# EAGLE board Projeto do Esquemático + PCB do Minilab v8 (EAGLE 9.7.0)
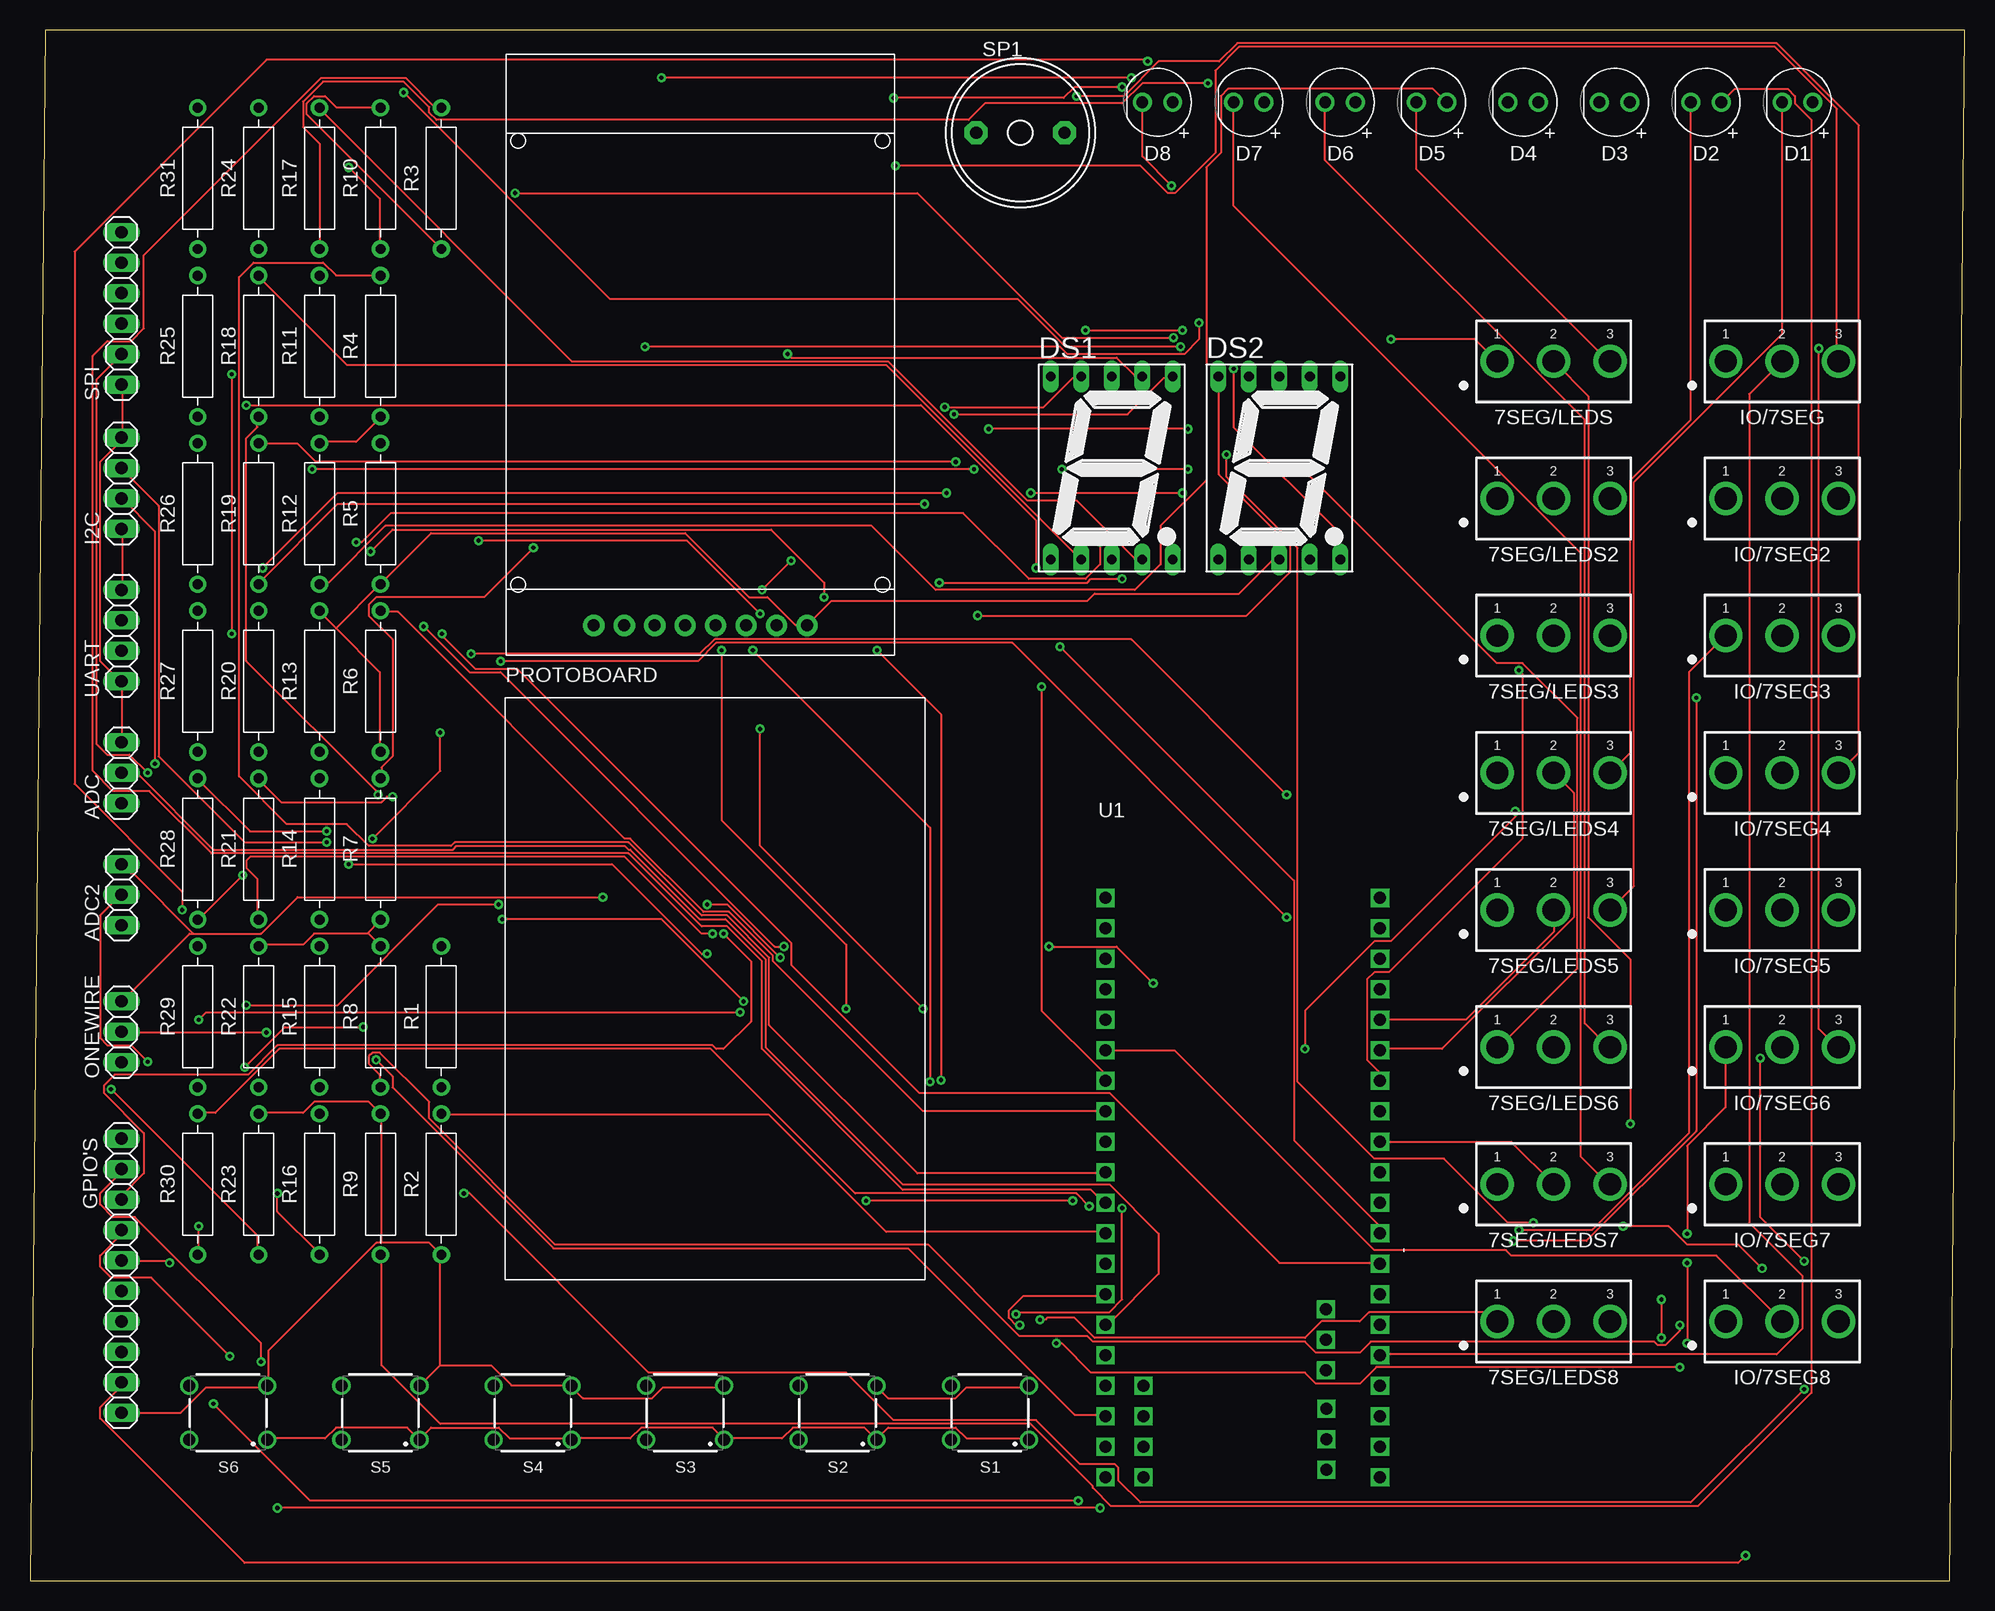
[diagram p0: board, top side]
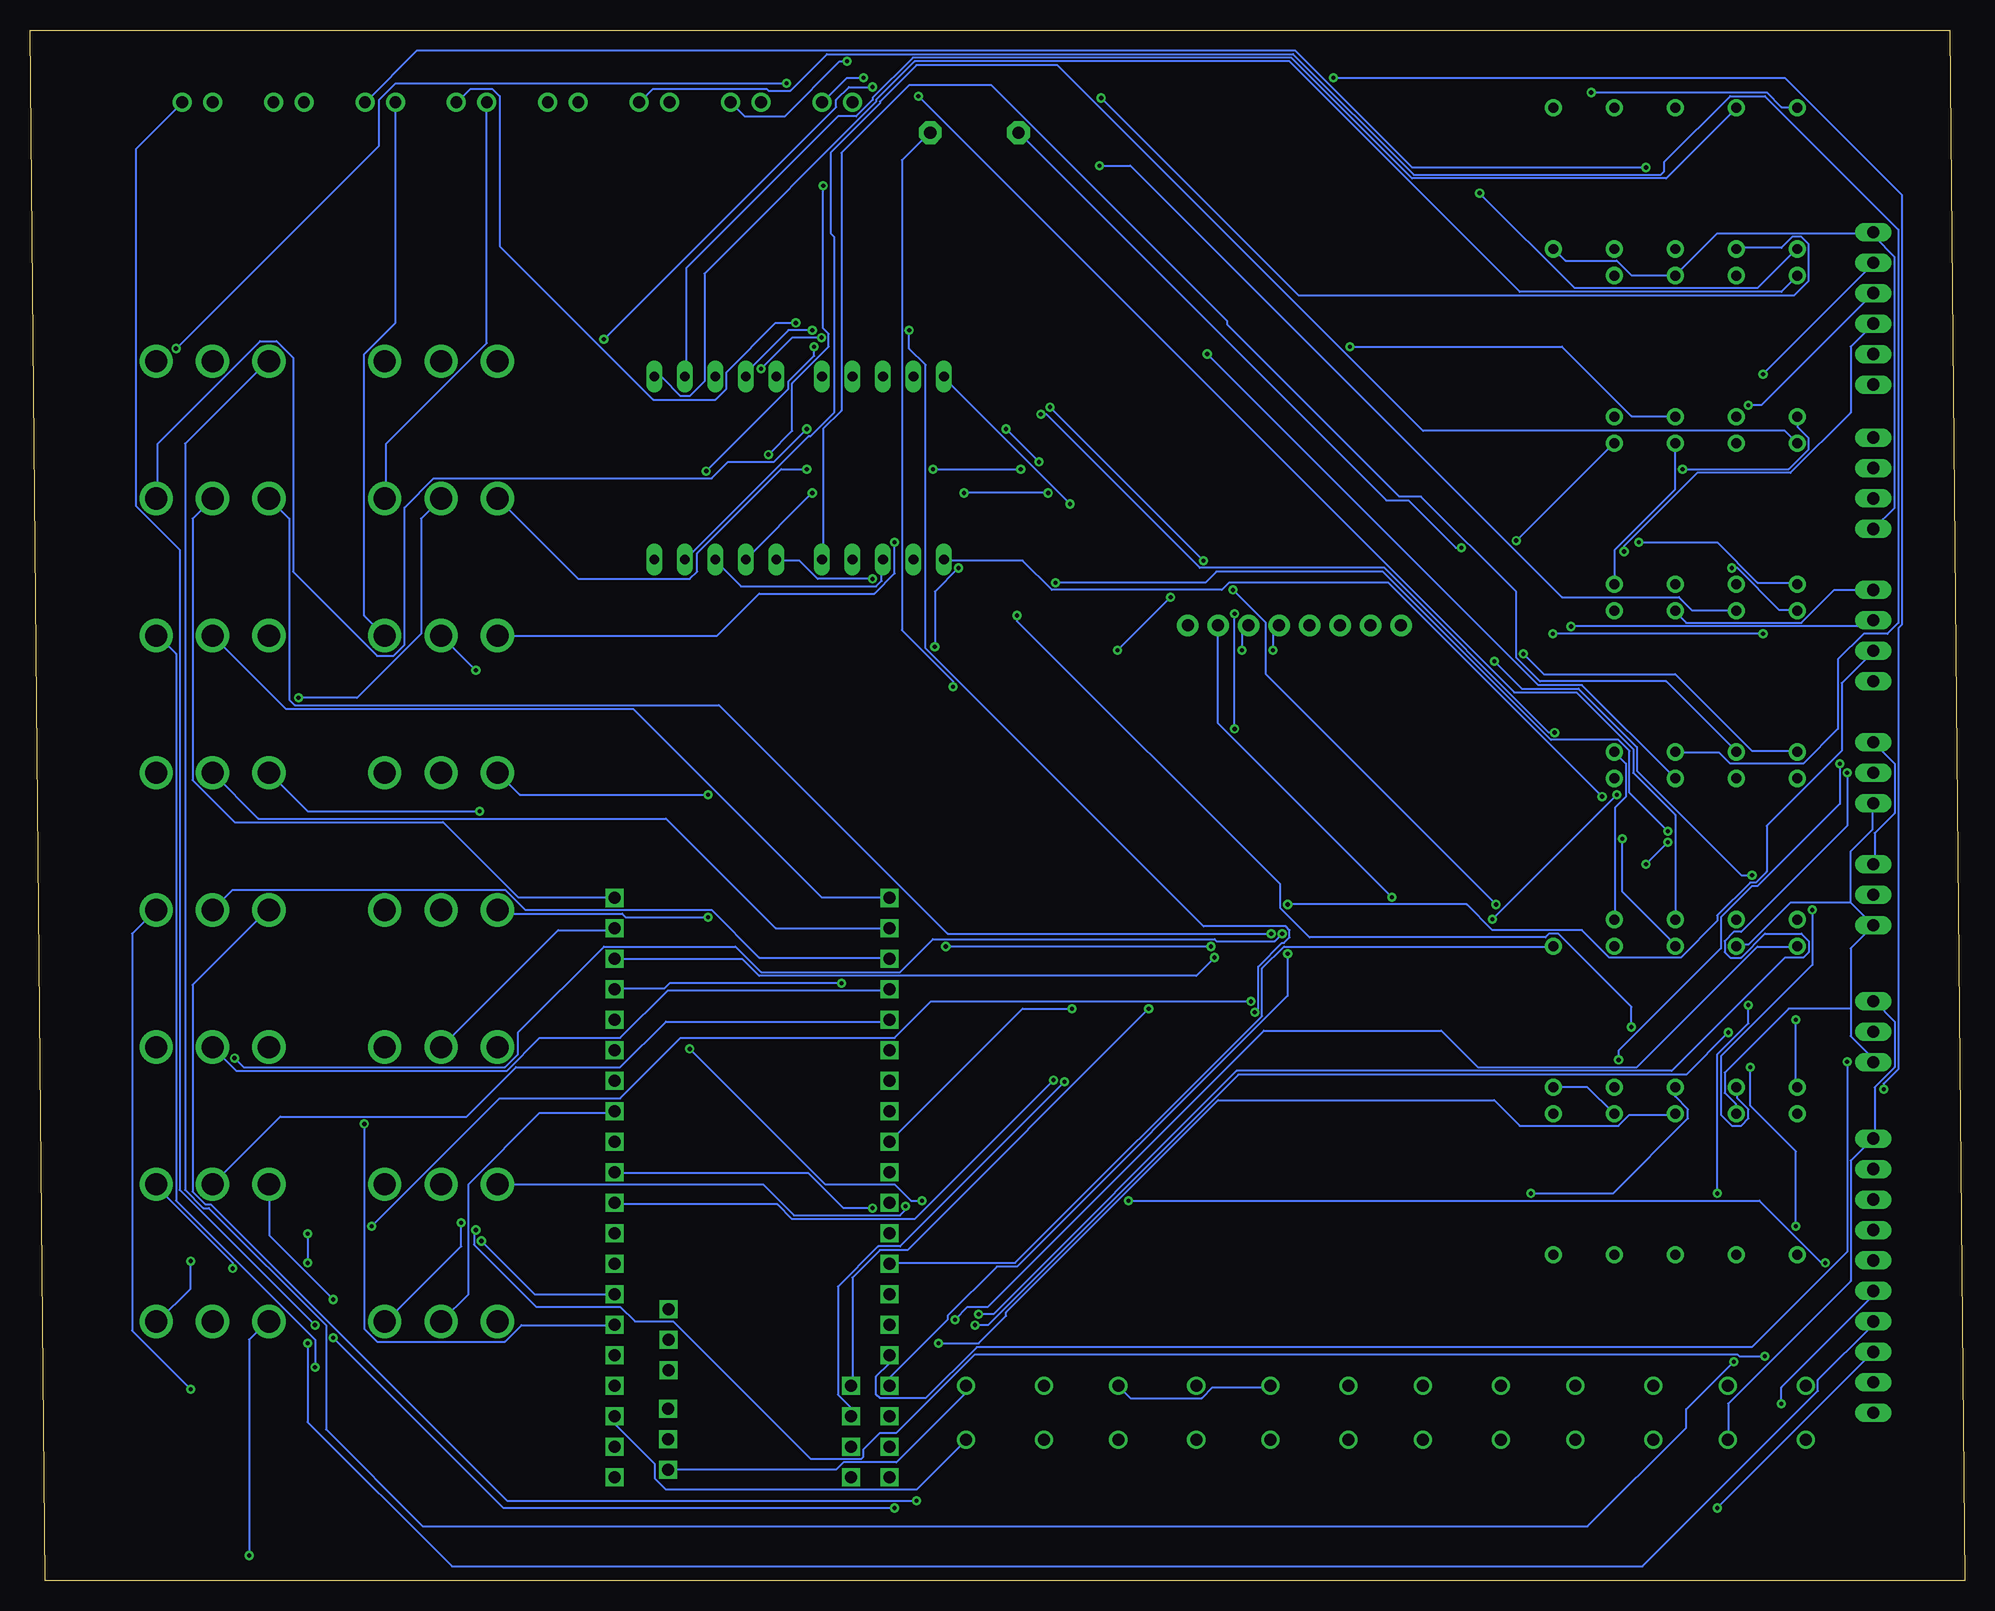
[diagram p1: board, bottom side, seen from below]

Size 161.27 x 129.21 mm. Coordinates in mm from the lower left corner, seen from the top.
Outline: 0,0 160,0 161.27,129.21 1.27,129.21 0,0
Copper layers (1*16): Top / Bottom
Stack-up Default Layer Stack: Top User Defined 0.035mm / Dielectric-1 User Defined 1.5mm / Bottom User Defined 0.035mm
Design rules "default": minimum track width 6mil, minimum drill 0.35mm, track to track 6mil, track to pad 6mil, pad to pad 6mil, via to via 6mil, smd to smd 6mil, copper to edge 40mil, drill to drill 6mil, minimum pad ring 10mil, minimum via ring 8mil, stop-mask expansion 4mil, vias tented up to drill 0mil, thermal gap 10mil

## Footprints (pad centres in the part's own frame; a part is rotated, then mirrored left to right if it is on the bottom)
472123010111 = drill 1.85: 1 4.7,0; 2 0,0; 3 -4.7,0
1X03 = drill 1.016 long: 1 -2.54,0; 2 0,0; 3 2.54,0
LEDRD254W60D565H860B = drill 0.981 pad 1.581: 1 -1.27,0; 2 1.27,0
7SEG-13 = drill 0.813 long: 1 -5.08,-7.62; 2 -2.54,-7.62; 3 0,-7.62; 4 2.54,-7.62; 5 5.08,-7.62; 6 5.08,7.62; 7 2.54,7.62; 8 0,7.62; 9 -2.54,7.62; 10 -5.08,7.62
1X10 = drill 1.016 long: 1 -11.43,0; 2 -8.89,0; 3 -6.35,0; 4 -3.81,0; 5 -1.27,0; 6 1.27,0; 7 3.81,0; 8 6.35,0; 9 8.89,0; 10 11.43,0
1X04 = drill 1.016 long: 1 -3.81,0; 2 -1.27,0; 3 1.27,0; 4 3.81,0
RESAD1176W63L850D250B = drill 0.83 pad 1.43: 1 -5.88,0; 2 5.88,0
4301X60507X6 = drill 1: 1 -3.25,2.25; 2 -3.25,-2.25; 3 3.25,2.25; 4 3.25,-2.25
AL11P = drill 1.016 pad 1.905 octagon: + 3.683,0; - -3.683,0
1X06 = drill 1.016 long: 1 -6.35,0; 2 -3.81,0; 3 -1.27,0; 4 1.27,0; 5 3.81,0; 6 6.35,0
FOOTPRINT-FRANZININHO = drill 1 square: P$1 -12.43,17.51; P$2 -12.43,14.97; P$3 -12.43,12.43; P$4 -12.43,9.89; P$5 -12.43,7.35; P$6 -12.43,4.81; P$7 -12.43,2.27; P$8 -12.43,-0.27; P$9 -12.43,-2.81; P$10 -12.43,-5.35; P$11 -12.43,-7.89; P$12 -12.43,-10.43; P$13 -12.43,-12.97; P$14 -12.43,-15.51; P$15 -12.43,-18.05; P$16 -12.43,-20.59; P$17 -12.43,-23.13; P$18 -12.43,-25.67; P$19 -12.43,-28.21; P$20 -12.43,-30.75; P$21 10.48,17.51; P$22 10.48,14.97; P$23 10.48,12.43; P$24 10.48,9.89; P$25 10.48,7.35; P$26 10.48,4.81; P$27 10.48,2.27; P$28 10.48,-0.27; P$29 10.48,-2.81; P$30 10.48,-5.35; P$31 10.48,-7.89; P$32 10.48,-10.43; P$33 10.48,-12.97; P$34 10.48,-15.51; P$35 10.48,-18.05; P$36 10.48,-20.59; P$37 10.48,-23.13; P$38 10.48,-25.67; P$39 10.48,-28.21; P$40 10.48,-30.75; P$41 -9.24,-23.13; P$42 -9.24,-25.67; P$43 -9.24,-28.21; P$44 -9.24,-30.75; P$45 6.01,-25.07; P$46 6.01,-27.61; P$47 6.01,-30.15; P$48 5.97,-16.78; P$49 5.97,-19.32; P$50 5.97,-21.86
1.44-TFT-V1.1 = drill 1 pad 1.778: BLK 0,17.78; CS 0,15.24; DC 0,12.7; GND 0,0; RESET 0,10.16; SCL 0,5.08; SDA 0,7.62; VCC 0,2.54

## Placement (x,y rotation side)
7SEG/LEDS  472123010111  [472123010111]  127,101.6 180 top
7SEG/LEDS2  472123010111  [472123010111]  127,90.17 180 top
7SEG/LEDS3  472123010111  [472123010111]  127,78.74 180 top
7SEG/LEDS4  472123010111  [472123010111]  127,67.31 180 top
7SEG/LEDS5  472123010111  [472123010111]  127,55.88 180 top
7SEG/LEDS6  472123010111  [472123010111]  127,44.45 180 top
7SEG/LEDS7  472123010111  [472123010111]  127,33.02 180 top
7SEG/LEDS8  472123010111  [472123010111]  127,21.59 180 top
ADC  PINHD-1X3  [1X03]  7.62,67.31 90 top
ADC2  PINHD-1X3  [1X03]  7.62,57.15 90 top
D1  LED_RED  [LEDRD254W60D565H860B]  147.32,123.19 180 top
D2  LED_RED  [LEDRD254W60D565H860B]  139.7,123.19 180 top
D3  LED_RED  [LEDRD254W60D565H860B]  132.08,123.19 180 top
D4  LED_RED  [LEDRD254W60D565H860B]  124.46,123.19 180 top
D5  LED_RED  [LEDRD254W60D565H860B]  116.84,123.19 180 top
D6  LED_RED  [LEDRD254W60D565H860B]  109.22,123.19 180 top
D7  LED_RED  [LEDRD254W60D565H860B]  101.6,123.19 180 top
D8  LED_RED  [LEDRD254W60D565H860B]  93.98,123.19 180 top
DS1  7SEG-CK  [7SEG-13]  90.17,92.71 0 top
DS2  7SEG-CK  [7SEG-13]  104.14,92.71 0 top
GPIO'S  PINHD-1X10  [1X10]  7.62,25.4 270 top
I2C  PINHD-1X4  [1X04]  7.62,91.44 90 top
IO/7SEG  472123010111  [472123010111]  146.05,101.6 180 top
IO/7SEG2  472123010111  [472123010111]  146.05,90.17 180 top
IO/7SEG3  472123010111  [472123010111]  146.05,78.74 180 top
IO/7SEG4  472123010111  [472123010111]  146.05,67.31 180 top
IO/7SEG5  472123010111  [472123010111]  146.05,55.88 180 top
IO/7SEG6  472123010111  [472123010111]  146.05,44.45 180 top
IO/7SEG7  472123010111  [472123010111]  146.05,33.02 180 top
IO/7SEG8  472123010111  [472123010111]  146.05,21.59 180 top
ONEWIRE  PINHD-1X3  [1X03]  7.62,45.72 90 top
PROTOBOARD  MINI-PROTOBOARD  [PROTOBOARDFOOTPRINT]  54.61,68.58 0 top
R1  [RESAD1176W63L850D250B]  34.29,46.99 90 top
R2  [RESAD1176W63L850D250B]  34.29,33.02 90 top
R3  [RESAD1176W63L850D250B]  34.29,116.84 90 top
R4  [RESAD1176W63L850D250B]  29.21,102.87 90 top
R5  [RESAD1176W63L850D250B]  29.21,88.9 90 top
R6  [RESAD1176W63L850D250B]  29.21,74.93 90 top
R7  [RESAD1176W63L850D250B]  29.21,60.96 90 top
R8  [RESAD1176W63L850D250B]  29.21,46.99 90 top
R9  [RESAD1176W63L850D250B]  29.21,33.02 90 top
R10  [RESAD1176W63L850D250B]  29.21,116.84 90 top
R11  [RESAD1176W63L850D250B]  24.13,102.87 90 top
R12  [RESAD1176W63L850D250B]  24.13,88.9 90 top
R13  [RESAD1176W63L850D250B]  24.13,74.93 90 top
R14  [RESAD1176W63L850D250B]  24.13,60.96 90 top
R15  [RESAD1176W63L850D250B]  24.13,46.99 90 top
R16  [RESAD1176W63L850D250B]  24.13,33.02 90 top
R17  [RESAD1176W63L850D250B]  24.13,116.84 90 top
R18  [RESAD1176W63L850D250B]  19.05,102.87 90 top
R19  [RESAD1176W63L850D250B]  19.05,88.9 90 top
R20  [RESAD1176W63L850D250B]  19.05,74.93 90 top
R21  [RESAD1176W63L850D250B]  19.05,60.96 90 top
R22  [RESAD1176W63L850D250B]  19.05,46.99 90 top
R23  [RESAD1176W63L850D250B]  19.05,33.02 90 top
R24  [RESAD1176W63L850D250B]  19.05,116.84 90 top
R25  [RESAD1176W63L850D250B]  13.97,102.87 90 top
R26  [RESAD1176W63L850D250B]  13.97,88.9 90 top
R27  [RESAD1176W63L850D250B]  13.97,74.93 90 top
R28  [RESAD1176W63L850D250B]  13.97,60.96 90 top
R29  [RESAD1176W63L850D250B]  13.97,46.99 90 top
R30  [RESAD1176W63L850D250B]  13.97,33.02 90 top
R31  [RESAD1176W63L850D250B]  13.97,116.84 90 top
S1  [4301X60507X6]  80.01,13.97 180 top
S2  [4301X60507X6]  67.31,13.97 180 top
S3  [4301X60507X6]  54.61,13.97 180 top
S4  [4301X60507X6]  41.91,13.97 180 top
S5  [4301X60507X6]  29.21,13.97 180 top
S6  [4301X60507X6]  16.51,13.97 180 top
SP1  AL11P  [AL11P]  82.55,120.65 0 top
SPI  PINHD-1X6  [1X06]  7.62,106.02 90 top
U1  FRANZININHOWIFI  [FOOTPRINT-FRANZININHO]  102.06,39.37 0 top
U$1  1.44"-TFT-V1.1  [1.44-TFT-V1.1]  64.77,79.6 90 top
UART  PINHD-1X4  [1X04]  7.62,78.74 90 top

## Library data of the parts
7SEG/LEDS 7SEG/LEDS2-7SEG/LEDS8 IO/7SEG IO/7SEG2-IO/7SEG8 = Wurth_Switch_WS-TOTV; ACTUATOR-LENGTH: 10.7mm; BUSHING-LENGTH: 9mm; DATASHEET-URL: https://www.we-online.com/redexpert/spec/472123010111?ae; MOUNT: THT; PART-NUMBER: 472123010111; SWITCHING-FUNCTION: ON-OFF-ON
ADC ADC2 GPIO'S I2C ONEWIRE SPI UART = Connector; CATEGORY: CONNECTOR; SUB-CATEGORY: PIN-HEADER
D1-D8 = Opto-Electronic; CATEGORY: Opto-Electronic; SUB-CATEGORY: LED
DS1 DS2 = Opto-Electronic; CATEGORY: Opto-Electronic; SUB-CATEGORY: Display; TYPE: 7-Segment
PROTOBOARD = MiniProtoboardLibrary
R1-R31 = Resistor; CATEGORY: Resistor; SUB-CATEGORY: Fixed
S1-S6 = Wurth_Switch_WS-TATV; DATASHEET-URL: https://www.we-online.com/catalog/datasheet/430156050726.pdf; H: 5.0mm; OPERATION-FORCE: 260g; PART-NUMBER: 430156050726; QTY: 200
SP1 = buzzer; OC_FARNELL: unknown; OC_NEWARK: unknown
U1 = Biblioteca Franzininho
U$1 = Biblioteca LCD

## Nets
3V3: U1.P$19
3V3_MALE: U1.P$43
5V_MALE: U1.P$48
5V_MALE1: U1.P$45
GND: U1.P$20
GND1: U1.P$39
GND2: U1.P$40
GND_MALE: U1.P$44
GND_MALE1: U1.P$49
GND_MALE2: U1.P$50
GND_MALE3: U1.P$46
N$1: R7.2 SP1.-
N$2: ADC2.1 ADC.1 DS1.3 DS2.3 GPIO'S.10 I2C.1 ONEWIRE.1 R1.1 R2.1 R3.1 R4.1 R5.1 R6.1 R7.1 R8.2 R9.2 R10.2 R11.2 R12.2 R13.2 R22.2 R23.2 S1.2 S2.2 S3.2 S4.2 S5.2 S6.2 SPI.6 U1.P$47 U$1.GND UART.4
N$3: R6.2 U1.P$8
N$4: 7SEG/LEDS4.2 U1.P$26
N$5: 7SEG/LEDS3.2 U1.P$27
N$6: R5.2 U1.P$9
N$7: 7SEG/LEDS.2 U1.P$35
N$8: 7SEG/LEDS2.2 U1.P$34
N$9: 7SEG/LEDS6.2 U1.P$22
N$10: R4.2 U1.P$10
N$11: R3.2 U1.P$11
N$12: R2.2 U1.P$12
N$13: R1.2 U1.P$13
N$14: U1.P$41 U$1.SDA
N$15: I2C.3 U1.P$17
N$16: ADC2.2 U1.P$16
N$17: 7SEG/LEDS5.2 U1.P$25
N$18: D1.1 R8.1
N$19: D2.1 R9.1
N$20: D3.1 R10.1
N$21: D4.1 R11.1
N$22: D5.1 R12.1
N$23: D6.1 R13.1
N$24: I2C.2 U1.P$18
N$25: U1.P$24 UART.3
N$26: U1.P$23 UART.2
N$27: SPI.2 U1.P$30
N$28: SPI.3 U1.P$31
N$29: SPI.4 U1.P$32
N$30: SPI.5 U1.P$33
N$31: D8.1 R23.1
N$32: ADC.2 U1.P$15
N$33: ONEWIRE.2 U1.P$14
N$34: SP1.+ U1.P$7
N$35: DS1.7 R14.2
N$36: IO/7SEG8.2 U1.P$6
N$37: IO/7SEG7.2 U1.P$5
N$38: DS1.6 R15.2
N$39: IO/7SEG3.2 U1.P$1
N$40: IO/7SEG6.2 U1.P$4
N$41: IO/7SEG5.2 U1.P$3
N$42: DS1.4 R17.2
N$43: DS1.2 R18.2
N$44: DS1.1 R21.2
N$45: IO/7SEG4.2 U1.P$2
N$46: DS1.9 R16.1
N$47: DS1.10 R19.1
N$48: IO/7SEG2.2 U1.P$21
N$49: DS1.5 R20.1
N$50: IO/7SEG.2 U1.P$36
N$51: ADC2.3 ADC.3 GPIO'S.1 I2C.4 ONEWIRE.3 S1.1 S2.1 S3.1 S4.1 S5.1 S6.1 SPI.1 U1.P$38 U$1.VCC UART.1
N$52: D7.1 R22.1
N$53: 7SEG/LEDS7.2 U1.P$29
N$54: 7SEG/LEDS8.2 U1.P$28
N$55: 7SEG/LEDS8.3 D8.2
N$56: DS2.2 R27.2
N$57: DS2.4 R26.2
N$58: DS2.6 R25.2
N$59: DS2.7 R24.2
N$60: DS2.1 R28.2
N$61: DS2.9 R29.1
N$62: DS2.10 R30.1
N$63: DS2.5 R31.1
N$64: 7SEG/LEDS.1 R24.1
N$65: 7SEG/LEDS2.1 R25.1
N$66: 7SEG/LEDS3.1 R26.1
N$67: 7SEG/LEDS4.1 R27.1
N$68: 7SEG/LEDS5.1 R28.1
N$69: 7SEG/LEDS6.1 R31.2
N$70: 7SEG/LEDS7.1 R30.2
N$71: 7SEG/LEDS8.1 R29.2
N$72: 7SEG/LEDS7.3 D7.2
N$73: 7SEG/LEDS6.3 D6.2
N$75: 7SEG/LEDS5.3 D1.2
N$76: 7SEG/LEDS4.3 D2.2
N$77: 7SEG/LEDS3.3 D3.2
N$78: 7SEG/LEDS2.3 D4.2
N$79: 7SEG/LEDS.3 D5.2
N$80: IO/7SEG7.3 R18.1
N$81: IO/7SEG6.3 R17.1
N$82: IO/7SEG5.3 R15.1
N$83: IO/7SEG4.3 R14.1
N$84: IO/7SEG8.3 R21.1
N$85: GPIO'S.9 IO/7SEG8.1
N$86: GPIO'S.8 IO/7SEG7.1
N$87: GPIO'S.7 IO/7SEG6.1
N$88: GPIO'S.6 IO/7SEG5.1
N$89: GPIO'S.5 IO/7SEG4.1
N$90: IO/7SEG3.3 R16.2
N$91: IO/7SEG2.3 R19.2
N$92: IO/7SEG.3 R20.2
N$93: GPIO'S.4 IO/7SEG3.1
N$94: GPIO'S.3 IO/7SEG2.1
N$95: GPIO'S.2 IO/7SEG.1
N$96: U1.P$42 U$1.SCL

## Tracks (layer width: path | path; a pad name or v marks a point on that pad's centre or on a via)
N$1  (via drill 0.35)
  Top 0.152: v41.96,86.06 37.85,81.94 28.85,81.94 28.25,81.33 28.25,80.42 30.23,78.44 30.23,68.68 29.31,67.77 29.31,66.85 R7.2
  Bottom 0.152: v41.96,86.06 42.42,86.06 46.38,90.02 48.21,90.02 78.84,120.65 SP1.-
N$2
  Top 0.152: S1.2 83.11,16.1 78.08,16.1 77.16,15.19 71.53,15.19 70.61,16.1 S2.2 | R23.2 19.1,38.96 22.76,38.96 23.67,39.88 28.25,39.88 29.16,38.96 R9.2 29.31,38.81 29.31,28.14 | GPIO'S.10 12.55,13.97 14.68,16.1 19.71,16.1 S6.2 19.86,16.26 19.86,19.15 28.85,28.14 29.31,28.14 | 34.19,17.93 34.19,27.08 R2.1 34.19,27.23 33.27,28.14 29.31,28.14 | 34.19,17.93 32.51,16.26 S5.2 | 34.19,17.93 38.46,17.93 40.13,16.26 45.01,16.26 S4.2 45.16,16.1 46.08,15.19 51.87,15.19 52.78,16.1 57.81,16.1 S3.2 | 28.09,53.9 28.25,53.9 29.16,52.98 R8.2 | 28.09,53.9 23.67,53.9 22.76,52.98 19.1,52.98 R22.2 | 28.09,53.9 29.16,54.97 R7.1 | R10.2 29.16,122.78 25.5,122.78 24.59,123.7 23.67,123.7 23.06,123.09 23.06,122.17 34.19,111.05 R3.1 | R12.2 24.13,94.89 27.18,94.89 29.16,96.88 R4.1 | UART.4 7.67,82.55 7.67,87.58 I2C.1 | 25.5,79.35 24.13,80.72 R13.2 | 25.5,79.35 29.16,75.69 29.16,69.14 R6.1 | 25.5,79.35 29.16,83.01 R5.1 29.31,83.16 33.43,87.27 54.61,87.27 59.94,81.94 61.47,81.94 63.75,79.65 64.67,79.65 U$1.GND 64.82,79.65 66.8,81.64 88.14,81.64 88.75,82.25 100.79,82.25 103.53,84.99 104.14,84.99 DS2.3
  Bottom 0.152: S3.2 57.96,16.1 62.69,16.1 63.6,15.19 69.55,15.19 70.46,16.1 S2.2 | U1.P$47 107.95,9.25 94.08,9.25 93.47,9.86 89.05,9.86 83.26,15.65 83.26,16.1 S1.2 | R1.1 34.19,41.1 31.45,41.1 29.31,38.96 R9.2 | 9.5,47.65 9.5,52.68 7.67,54.51 ADC2.1 9.5,56.49 | 9.5,47.65 9.5,45.36 7.67,43.54 7.67,43.23 ONEWIRE.1 | 9.5,56.49 9.5,60.76 7.67,62.59 7.67,64.72 ADC.1 | 9.5,56.49 14.53,56.49 18.03,52.98 18.95,52.98 R22.2 | 24.13,108.76 27.79,108.76 29.01,109.98 33.27,109.98 34.19,110.9 R3.1 | 24.13,108.76 20.62,112.27 7.67,112.27 SPI.6 7.52,112.27 7.52,111.96 5.84,110.29 5.84,89.41 I2C.1 | 24.13,108.76 R11.2 | DS1.3 90.27,84.99 90.27,83.31 90.73,82.86 102.01,82.86 104.14,84.99 DS2.3 | UART.4 10.87,82.55 13.61,79.81 23.22,79.81 24.13,80.72 R13.2 | R12.2 24.13,90.93 29.16,85.9 29.16,83.16 R5.1 | R7.1 29.16,55.12 29.16,64.41 28.25,65.33 28.25,68.07 29.16,68.99 R6.1 | 9.5,47.65 14.68,47.65 20.02,42.32 20.02,40.64 19.1,39.73 19.1,38.96 R23.2
N$3
  Top 0.152: R6.2 29.31,80.72 30.68,80.72 49.58,61.82 50.04,61.82 56.13,55.73 58.27,55.73 61.93,52.07 61.93,51.61 74.42,39.12 89.51,39.12 U1.P$8
N$4
  Top 0.152: 7SEG/LEDS4.2 128.68,65.63 128.68,55.27 117.7,44.3 112.67,44.3 U1.P$26
N$5  (via drill 0.35)
  Top 0.152: v124.1,75.84 124.41,75.54 124.41,61.82 113.28,50.7 112.06,50.7 111.45,50.09 111.45,43.38 112.52,42.32 112.52,41.71 U1.P$27
  Bottom 0.152: 7SEG/LEDS3.2 v124.1,75.84
N$6  (via drill 0.35)
  Top 0.152: v37.39,86.66 54.76,86.66 v60.86,80.57 | v60.86,70.97 60.86,61.21 v74.42,47.65
  Bottom 0.152: v37.39,86.66 29.31,94.74 R5.2 | v60.86,70.97 v60.86,80.57 | v74.42,47.65 78.54,47.65 89.51,36.68 U1.P$9
N$7  (via drill 0.35)
  Top 0.152: v133.4,38.05 133.4,51.77 129.9,55.27 129.9,98.7 7SEG/LEDS.2
  Bottom 0.152: v133.4,38.05 133.4,20.98 132.33,19.91 121.67,19.91 120.29,21.29 112.67,21.29 U1.P$35
N$8  (via drill 0.35)
  Top 0.152: v123.65,28.3 129.74,28.3 138.89,37.44 v138.89,73.56
  Bottom 0.152: v123.65,28.3 119.23,23.88 112.67,23.88 U1.P$34 | v138.89,73.56 134.01,73.56 128.68,78.89 128.68,88.49 7SEG/LEDS2.2
N$9
  Bottom 0.152: 7SEG/LEDS6.2 117.25,54.2 112.67,54.2 U1.P$22
N$10
  Top 0.152: R4.2 29.16,108.76 25.5,108.76 24.43,109.83 18.64,109.83 17.42,108.61 17.42,67 21.39,63.04 26.42,63.04 28.25,61.21 35.1,61.21 35.41,61.52 49.89,61.52 55.98,55.42 58.12,55.42 61.62,51.92 61.62,46.28 73.96,33.93 89.51,33.93 U1.P$10
N$11
  Top 0.152: R3.2 34.19,122.78 33.73,122.78 31.29,125.22 24.28,125.22 9.5,110.44 9.5,104.34 8.43,103.28 6.45,103.28 5.23,102.06 5.23,67.46 6.91,65.79 9.96,65.79 15.14,60.6 49.89,60.6 55.98,54.51 58.12,54.51 61.01,51.61 61.01,44.3 72.75,32.56 88.44,32.56 89.51,31.5 U1.P$11
N$12
  Top 0.152: R2.2 34.34,38.81 61.62,38.81 71.37,29.06 89.51,29.06 U1.P$12
N$13
  Bottom 0.152: R1.2 34.34,52.83 56.74,52.83 58.57,51 58.57,47.04 79.15,26.47 89.51,26.47 U1.P$13
N$14  (via drill 0.35)
  Top 0.152: v68.02,47.65 68.02,52.98 57.66,63.35 v57.66,77.52
  Bottom 0.152: v68.02,47.65 88.14,27.53 90.42,27.53 92.71,25.25 92.71,16.26 U1.P$41 | v57.66,77.52 57.66,79.05 57.2,79.5 U$1.SDA
N$15  (via drill 0.35)
  Top 0.152: v56.44,52.22 55.98,52.22 48.51,59.69 v26.57,59.69 | v24.74,61.52 17.88,61.52 10.72,68.68 10.72,89.56 7.67,92.61 I2C.3
  Bottom 0.152: v56.44,52.22 56.44,48.72 78.99,26.16 80.67,26.16 84.78,22.05 84.78,21.74 89.51,17.02 89.51,16.26 U1.P$17 | v24.74,61.52 v26.57,59.69
N$16  (via drill 0.35)
  Top 0.152: v9.8,43.23 8.43,44.6 6.45,44.6 5.84,45.21 5.84,55.42 7.52,57.1 ADC2.2
  Bottom 0.152: v9.8,43.23 9.8,27.38 17.73,19.46 82.35,19.46 86.61,15.19 90.42,15.19 90.73,15.49 90.73,17.02 89.66,18.09 89.66,18.69 U1.P$16
N$17
  Top 0.152: 7SEG/LEDS5.2 127,54.05 119.69,46.74 112.67,46.74 U1.P$25
N$18  (via drill 0.35)
  Top 0.152: v137.52,21.29 137.52,20.83 136.3,19.61 135.69,19.61 135.38,19.91 111.76,19.91 110.85,19 107.19,19 106.27,19.91 88.59,19.91 88.14,20.37 82.5,20.37 74.88,27.99 43.79,27.99 33.27,38.51 33.27,39.88 29.16,43.99 28.55,43.99 28.25,43.69 28.25,43.08 29.16,42.16 29.16,41.25 R8.1
  Bottom 0.152: v137.52,21.29 148.79,32.56 148.79,85.9 152.45,89.56 152.45,119.28 148.64,123.09 D1.1
N$19
  Top 0.152: D2.1 142.09,124.31 146.51,124.31 147.12,123.7 147.12,123.09 148.49,121.72 148.49,15.65 139.04,6.2 90.12,6.2 88.59,7.72 88.59,7.87 83.41,13.06 34.19,13.06 29.31,17.93 29.31,27.08 R9.1
N$20  (via drill 0.35)
  Top 0.152: v26.57,117.75 29.16,115.16 29.16,111.05 R10.1
  Bottom 0.152: v26.57,117.75 46.08,117.75 55.83,127.51 128.98,127.51 133.25,123.24 D3.1
N$21  (via drill 0.35)
  Top 0.152: v51.26,102.82 85.85,102.82 86.46,102.21 96.21,102.21 97.43,103.43 v97.43,104.8
  Bottom 0.152: v51.26,102.82 33.58,102.82 27.79,97.03 24.13,97.03 R11.1 | v97.43,104.8 99.11,104.8 103.23,100.69 103.23,99.31 104.14,98.4 109.32,98.4 122.12,111.2 122.12,123.7 122.73,124.31 124.56,124.31 125.63,123.24 D4.1
N$22
  Top 0.152: R12.1 24.13,83.16 24.89,83.16 29.62,87.88 70.16,87.88 75.49,82.55 92.1,82.55 94.23,84.68 94.23,87.88 98.04,91.69 98.04,117.75 99.26,118.97 99.26,123.7 99.87,124.31 116.94,124.31 118.01,123.24 D5.1
N$23
  Bottom 0.152: R13.1 24.13,68.99 20.47,68.99 19.56,68.07 13.46,68.07 10.57,70.97 10.57,76.76 8.43,78.89 6.45,78.89 5.54,79.81 5.54,112.57 16.66,123.7 19.56,123.7 25.04,118.21 25.04,117.45 25.35,117.15 45.92,117.15 55.98,127.2 94.84,127.2 97.89,124.16 99.72,124.16 99.87,124.31 109.32,124.31 110.39,123.24 D6.1
N$24  (via drill 0.35)
  Top 0.152: v28.85,43.38 30.23,42.01 30.23,41.1 43.64,27.69 73.2,27.69 87.07,13.82 89.51,13.82 U1.P$18 | v10.41,68.07 10.41,87.43 7.67,90.17 I2C.2
  Bottom 0.152: v28.85,43.38 28.85,44.15 20.32,52.68 20.32,55.27 17.73,57.86 17.27,57.86 10.41,64.72 v10.41,68.07
N$25  (via drill 0.35)
  Top 0.152: v93.62,49.78 90.58,52.83 v84.94,52.83 | v62.84,52.83 62.08,52.83 39.22,75.69 36.63,75.69 v32.82,79.5
  Bottom 0.152: v93.62,49.78 107.95,49.78 108.41,49.33 112.52,49.33 U1.P$24 | v62.84,52.83 v84.94,52.83 | v32.82,79.5 8.13,79.5 UART.3
N$26  (via drill 0.35)
  Top 0.152: v62.54,51.92 58.12,56.34 v56.44,56.34
  Bottom 0.152: v62.54,51.92 64.06,50.39 100.48,50.39 101.85,51.77 112.52,51.77 U1.P$23 | v56.44,56.34 41.5,56.34 39.37,54.2 31.9,54.2 29.62,51.92 23.67,51.92 20.62,54.97 20.62,55.42 17.88,58.17 17.42,58.17 16.51,59.08 16.51,62.89 10.26,69.14 10.26,74.78 7.67,77.37 UART.2
N$27  (via drill 0.35)
  Top 0.152: v91.03,31.04 91.03,23.42 89.97,22.35 82.35,22.35 v82.19,22.2 | v9.8,67.31 8.28,68.83 6.45,68.83 5.54,69.75 5.54,100.08 7.52,102.06 SPI.2
  Bottom 0.152: v91.03,31.04 93.47,31.04 96.37,33.93 112.52,33.93 U1.P$30 | v82.19,22.2 80.97,22.2 60.71,42.47 24.43,42.47 14.99,51.92 13.46,51.92 13,52.38 13,53.29 13.61,53.9 16.66,53.9 18.64,51.92 19.56,51.92 20.02,52.38 20.02,53.29 19.25,54.05 18.64,54.05 9.8,62.89 v9.8,67.31
N$28  (via drill 0.35)
  Top 0.152: v75.95,41.71 75.95,72.19 v70.61,77.52 | v66.19,81.94 66.19,83.16 61.77,87.58 30.23,87.58 v28.4,85.75
  Bottom 0.152: v75.95,41.71 87.53,30.12 97.74,30.12 98.96,31.34 112.52,31.34 U1.P$31 | v66.19,81.94 v70.61,77.52 | v28.4,85.75 28.4,86.21 22.3,92.3 14.53,92.3 9.5,97.33 9.5,102.82 7.67,104.65 SPI.3
N$29  (via drill 0.35)
  Top 0.152: v85.85,77.83 105.36,58.32 105.36,36.68 112.52,29.52 112.52,29.06 U1.P$32 | v83.87,84.38 83.87,88.34 74.27,97.94 v18.03,97.94
  Bottom 0.152: v85.85,77.83 85.85,82.4 v83.87,84.38 | v18.03,97.94 16.97,97.94 7.67,107.24 SPI.4
N$30  (via drill 0.35)
  Top 0.152: v34.34,78.89 34.34,78.74 37.08,76 40.59,76 63.45,53.14 63.45,51.31 74.12,40.64 89.97,40.64 104.14,26.47 112.52,26.47 U1.P$33 | v16.82,100.53 v16.82,78.89
  Bottom 0.152: v16.82,78.89 v34.34,78.89 | v16.82,100.53 7.67,109.68 SPI.5
N$31  (via drill 0.35)
  Top 0.152: v6.76,40.95 18.95,28.75 18.95,27.23 R23.1 | v91.8,125.22 v52.63,125.22
  Bottom 0.152: v6.76,40.95 6.76,41.4 5.54,42.62 5.54,79.35 5.23,79.65 5.23,115.47 14.99,125.22 v52.63,125.22 | v91.8,125.22 93.17,125.22 95.15,123.24 D8.1
N$32
  Top 0.152: ADC.2 8.89,67.31 15.29,60.91 35.26,60.91 35.56,61.21 49.58,61.21 49.89,60.91 50.04,60.91 55.83,55.12 57.96,55.12 61.32,51.77 61.32,44.45 72.75,33.02 89.97,33.02 94.08,28.91 94.08,25.55 89.97,21.44 89.66,21.44 U1.P$15
N$33  (via drill 0.35)
  Top 0.152: v82.5,21.29 82.19,21.29 81.58,21.89 81.58,22.5 82.8,23.72 89.51,23.72 U1.P$14 | v19.71,45.67 7.67,45.67 ONEWIRE.2
  Bottom 0.152: v82.5,21.29 81.43,21.29 60.55,42.16 23.22,42.16 v19.71,45.67
N$34  (via drill 0.35)
  Top 0.152: v84.33,74.47 84.33,47.5 89.51,42.32 89.51,41.71 U1.P$7
  Bottom 0.152: v84.33,74.47 84.33,74.93 88.59,79.2 88.59,118.36 86.31,120.65 SP1.+
N$35  (via drill 0.35)
  Top 0.152: v63.14,102.21 63.45,101.91 90.58,101.91 92.1,100.38 92.71,100.38 DS1.7
  Bottom 0.152: v63.14,102.21 35.56,74.62 31.9,74.62 24.13,66.85 R14.2
N$36
  Top 0.152: IO/7SEG8.2 140.56,27.08 123.49,27.08 123.04,27.53 112.06,27.53 95.45,44.15 89.66,44.15 U1.P$6
N$37
  Bottom 0.152: IO/7SEG7.2 140.41,38.66 124.87,38.66 120.75,42.77 112.06,42.77 108.25,46.58 89.66,46.58 U1.P$5
N$38  (via drill 0.35)
  Top 0.152: v77.01,97.18 91.49,97.18 94.54,100.23 95.15,100.23 DS1.6 | v34.19,70.66 34.19,67.46 v28.55,61.82
  Bottom 0.152: v77.01,97.18 76.56,97.18 63.75,84.38 48.36,84.38 34.65,70.66 v34.19,70.66 | v28.55,61.82 28.55,57.4 24.13,52.98 R15.2
N$39
  Bottom 0.152: IO/7SEG3.2 139.95,72.64 111,72.64 95.3,56.95 89.66,56.95 U1.P$1
N$40
  Bottom 0.152: IO/7SEG6.2 144.07,42.47 121.51,42.47 118.77,45.21 112.06,45.21 108.1,49.17 89.66,49.17 U1.P$4
N$41
  Bottom 0.152: IO/7SEG5.2 144.37,57.56 121.67,57.56 119.99,55.88 104.44,55.88 100.48,51.92 89.66,51.92 U1.P$3
N$42
  Top 0.152: DS1.4 92.71,85.14 92.1,85.14 87.22,90.02 83.11,90.02 71.53,101.6 45.16,101.6 24.13,122.63 R17.2
N$43
  Top 0.152: DS1.2 87.53,85.14 71.37,101.29 26.42,101.29 19.1,108.61 R18.2
N$44  (via drill 0.35)
  Top 0.152: v30.23,65.33 29.77,65.33 29.31,64.87 20.93,64.87 19.1,66.7 R21.2
  Bottom 0.152: v30.23,65.33 48.06,83.16 61.32,83.16 61.93,82.55 76.1,82.55 78.54,84.99 85.09,84.99 DS1.1
N$45
  Bottom 0.152: IO/7SEG4.2 142.24,63.5 108.25,63.5 99.11,54.36 89.66,54.36 U1.P$2
N$46  (via drill 0.35)
  Top 0.152: v76.25,97.79 84.48,97.79 86.92,100.23 87.53,100.23 DS1.9 | v61.01,82.55 v63.45,84.99 | v39.07,56.34 34.04,56.34 25.65,47.95 v18.03,47.95 | v20.62,32.26 20.62,30.73 24.13,27.23 R16.1
  Bottom 0.152: v63.45,84.99 v76.25,97.79 | v61.01,82.55 58.27,79.81 58.27,75.54 v39.07,56.34 | v18.03,47.95 18.03,46.43 20.62,43.84 v20.62,32.26
N$47  (via drill 0.35)
  Top 0.152: v74.57,89.71 25.65,89.71 19.1,83.16 R19.1
  Bottom 0.152: v74.57,89.71 85.09,100.23 DS1.10
N$48
  Bottom 0.152: IO/7SEG2.2 147.73,88.49 147.73,66.7 144.22,63.2 126.85,63.2 120.6,56.95 112.67,56.95 U1.P$21
N$49
  Bottom 0.152: DS1.5 95.15,85.14 95.15,95.96 93.62,97.49 93.62,118.97 87.99,124.61 81.13,124.61 61.47,104.95 61.47,104.65 47.14,90.32 45.31,90.32 37.39,82.4 37.39,76.91 35.41,74.93 24.89,74.93 19.1,69.14 R20.1
N$50
  Top 0.152: IO/7SEG.2 143.31,98.86 143.31,29.82 147.73,25.4 147.73,20.98 145.59,18.85 112.67,18.85 U1.P$36
N$51  (via drill 0.35)
  Top 0.152: S6.1 19.86,11.84 24.59,11.84 25.5,12.75 31.45,12.75 32.36,11.84 S5.1 32.51,11.84 33.43,12.75 39.07,12.75 39.98,11.84 45.01,11.84 S4.1 45.16,11.84 50.04,11.84 50.95,12.75 56.9,12.75 57.81,11.84 S3.1 57.96,11.84 62.69,11.84 63.6,12.75 69.55,12.75 70.46,11.84 S2.1 70.61,11.84 71.53,12.75 77.16,12.75 78.08,11.84 83.11,11.84 S1.1 | SPI.1 7.67,99.62 7.67,95.35 I2C.4 7.52,95.2 7.52,94.89 5.84,93.22 5.84,76.61 7.52,74.93 UART.1 7.67,74.93 7.67,69.9 ADC.3 | v47.75,56.95 22.3,56.95 19.25,53.9 13.61,53.9 | 13.61,53.9 13.31,53.9 7.67,48.26 ONEWIRE.3 | 13.61,53.9 8.59,58.93 8.43,58.93 7.67,59.69 ADC2.3
  Bottom 0.152: U1.P$38 112.52,13.67 112.52,13.06 109.17,9.7 109.17,8.48 108.25,7.57 87.38,7.57 83.26,11.68 S1.1 | ADC.3 5.84,68.07 5.84,63.96 7.52,62.28 7.52,59.69 ADC2.3 | ONEWIRE.3 7.52,48.26 5.84,46.58 5.84,42.77 7.52,41.1 7.52,36.83 GPIO'S.1 7.67,36.83 9.5,35 9.5,24.94 19.71,14.73 19.71,11.84 S6.1 | U$1.VCC 62.23,71.43 v47.75,56.95
N$52  (via drill 0.35)
  Top 0.152: v12.7,55.88 12.7,57.4 3.71,66.4 3.71,110.74 19.71,126.75 93.02,126.75 v93.17,126.59
  Bottom 0.152: v12.7,55.88 12.7,51.31 20.32,43.69 20.32,38.81 19.41,37.9 18.64,37.9 18.03,38.51 18.03,39.27 18.95,40.18 18.95,41.1 R22.1 | v93.17,126.59 93.78,126.59 98.35,122.02 101.7,122.02 D7.1
N$53
  Top 0.152: 7SEG/LEDS7.2 123.49,36.52 112.67,36.52 U1.P$29
N$54
  Bottom 0.152: 7SEG/LEDS8.2 124.71,23.88 124.71,33.02 118.77,38.96 112.67,38.96 U1.P$28
N$55  (via drill 0.35)
  Top 0.152: D8.2 92.71,118.67 v95.15,116.23 | v99.72,93.83 99.72,92 105.66,86.06 105.66,41.55 112.06,35.15 117.86,35.15 123.19,29.82 v125.32,29.82
  Bottom 0.152: v95.15,116.23 95.15,104.34 94.69,103.89 94.69,102.82 97.74,99.77 97.74,95.81 v99.72,93.83 | v125.32,29.82 125.32,27.84 131.57,21.59 7SEG/LEDS8.3
N$56  (via drill 0.35)
  Top 0.152: v83.41,90.63 v96.06,90.63 | v76.4,90.63 25.65,90.63 v19.41,84.38
  Bottom 0.152: v96.06,90.63 DS2.2 | v76.4,90.63 v83.41,90.63 | v19.41,84.38 18.95,84.38 15.44,80.87 14.07,80.87 R27.2
N$57
  Bottom 0.152: DS2.4 106.58,85.14 96.37,95.35 96.21,95.35 94.23,97.33 94.23,111.96 94.54,112.27 94.54,118.97 90.42,123.09 90.42,123.24 87.38,126.29 75.64,126.29 45.16,95.81 14.99,95.81 14.07,94.89 R26.2
N$58
  Bottom 0.152: DS2.6 109.17,100.23 108.56,100.23 107.04,98.7 106.27,98.7 105.05,99.92 105.05,108.91 90.73,123.24 90.73,123.39 87.53,126.59 56.29,126.59 37.08,107.39 15.29,107.39 14.07,108.61 R25.2
N$59
  Bottom 0.152: DS2.7 106.58,100.38 106.58,109.37 93.93,122.02 92.41,122.02 91.03,123.39 91.03,123.55 87.68,126.9 56.13,126.9 46.08,116.84 24.89,116.84 19.1,122.63 R24.2
N$60  (via drill 0.35)
  Top 0.152: v91.03,83.46 88.44,83.46 88.14,83.16 v75.79,83.16 | v24.74,62.43 18.34,62.43 14.07,66.7 R28.2
  Bottom 0.152: v91.03,83.46 95.61,83.46 97.13,84.99 98.96,84.99 DS2.1 | v75.79,83.16 63.3,83.16 62.38,84.07 48.51,84.07 34.49,70.05 28.85,70.05 27.94,69.14 27.94,65.63 v24.74,62.43
N$61  (via drill 0.35)
  Top 0.152: v87.99,104.19 v96.06,104.19 | v59.18,47.35 14.68,47.35 v14.07,46.74
  Bottom 0.152: v96.06,104.19 98.04,104.19 101.55,100.69 101.55,100.38 DS2.9 | v87.99,104.19 87.99,102.67 86.61,101.29 86.61,77.67 63.45,54.51 56.59,54.51 56.29,54.2 56.29,53.59 56.74,53.14 56.9,53.14 58.88,51.16 58.88,47.65 v59.18,47.35 | v14.07,46.74 14.07,41.25 R29.1
N$62  (via drill 0.35)
  Top 0.152: v78.99,80.42 101.4,80.42 105.05,84.07 105.05,86.21 99.11,92.15 99.11,100.23 DS2.10 | v27.79,46.13 21.23,46.13 v17.88,42.77 | v14.07,29.52 14.07,27.23 R30.1
  Bottom 0.152: v78.99,80.42 78.99,79.96 57.05,58.01 57.05,56.03 54.61,53.59 34.95,53.59 34.65,53.9 33.88,53.9 27.79,47.8 v27.79,46.13 | v17.88,42.77 17.88,39.57 14.07,35.76 v14.07,29.52
N$63  (via drill 0.35)
  Top 0.152: v100.33,100.99 100.33,96.11 109.17,87.27 109.17,85.14 DS2.5 | v95.3,103.58 86,103.58 73.96,115.62 v40.44,115.62
  Bottom 0.152: v100.33,100.99 97.74,103.58 v95.3,103.58 | v40.44,115.62 32.51,107.7 17.27,107.7 14.07,110.9 R31.1
N$64  (via drill 0.35)
  Top 0.152: v71.98,123.55 86.16,123.55 87.07,124.46 v91.03,124.46 | v113.44,103.43 120.45,103.43 122.28,101.6 7SEG/LEDS.1
  Bottom 0.152: v71.98,123.55 55.52,107.09 14.22,107.09 13,108.31 13,111.35 13.61,111.96 14.38,111.96 15.29,111.05 18.95,111.05 R24.1 | v91.03,124.46 93.02,124.46 94.08,123.39 94.08,122.78 v113.44,103.43
N$65  (via drill 0.35)
  Top 0.152: v78.69,92.61 v23.52,92.61 | v96.52,92.61 v86,92.61
  Bottom 0.152: v23.52,92.61 14.68,92.61 13,94.28 13,95.2 13.92,96.11 13.92,96.88 R25.1 | v86,92.61 v78.69,92.61 | v96.52,92.61 98.65,92.61 105.66,85.6 105.66,84.07 106.27,83.46 115.57,83.46 122.28,90.17 7SEG/LEDS2.1
N$66  (via drill 0.35)
  Top 0.152: v27.18,86.51 27.63,86.51 30.07,88.95 77.77,88.95 83.26,83.46 87.99,83.46 89.2,84.68 v89.2,86.51
  Bottom 0.152: v27.18,86.51 20.62,86.51 17.27,83.16 14.07,83.16 R26.1 | v89.2,86.51 89.2,83.92 90.88,82.25 100.48,82.25 103.99,78.74 7SEG/LEDS3.1
N$67  (via drill 0.35)
  Top 0.152: v36.78,77.22 55.83,77.22 57.05,78.44 91.8,78.44 v104.75,65.48
  Bottom 0.152: v36.78,77.22 35.1,75.54 24.13,75.54 17.73,69.14 14.07,69.14 R27.1 | v104.75,65.48 120.45,65.48 122.28,67.31 7SEG/LEDS4.1
N$68  (via drill 0.35)
  Top 0.152: v17.73,58.78 14.07,55.12 R28.1 | v39.22,76.61 55.68,76.61 57.2,78.13 81.89,78.13 v104.75,55.27
  Bottom 0.152: v17.73,58.78 18.64,58.78 27.33,67.46 27.33,69.44 32.21,74.32 36.93,74.32 v39.22,76.61 | v104.75,55.27 111.61,55.27 111.91,55.58 121.97,55.58 122.28,55.88 7SEG/LEDS5.1
N$69  (via drill 0.35)
  Top 0.152: v31.14,124 48.36,106.78 82.35,106.78 86.31,102.82 v95.91,102.82 | v104.9,92.46 106.27,92.46 122.28,76.45 124.41,76.45 128.98,71.88 128.98,51 122.43,44.45 7SEG/LEDS6.1
  Bottom 0.152: v31.14,124 16.51,124 15.29,122.78 14.07,122.78 R31.2 | v95.91,102.82 95.91,102.06 98.04,99.92 98.04,99.31 v104.9,92.46
N$70  (via drill 0.35)
  Top 0.152: v88.29,31.19 87.22,32.26 68.78,32.26 56.74,44.3 20.78,44.3 15.44,38.96 14.07,38.96 R30.2
  Bottom 0.152: v88.29,31.19 88.29,30.89 88.75,30.43 97.59,30.43 100.18,33.02 7SEG/LEDS7.1
N$71  (via drill 0.35)
  Top 0.152: v84.18,21.74 84.63,21.74 84.78,21.89 87.07,21.89 88.75,20.22 106.27,20.22 107.64,21.59 110.85,21.59 111.61,22.35 121.51,22.35 122.28,21.59 7SEG/LEDS8.1
  Bottom 0.152: v84.18,21.74 83.11,22.81 81.43,22.81 58.42,45.82 43.64,45.82 40.59,42.77 27.33,42.77 17.27,52.83 14.07,52.83 R29.2
N$72
  Top 0.152: D7.2 100.33,114.55 129.29,85.6 129.29,35.31 131.57,33.02 7SEG/LEDS7.3
N$73
  Top 0.152: D6.2 107.95,118.36 129.59,96.72 129.59,46.43 131.57,44.45 7SEG/LEDS6.3
N$75
  Top 0.152: D1.2 146.05,103.89 133.71,91.54 133.71,57.86 131.72,55.88 7SEG/LEDS5.3
N$76
  Top 0.152: D2.2 138.43,96.72 133.4,91.69 133.4,68.99 131.72,67.31 7SEG/LEDS4.3
N$77
  Bottom 0.152: D3.2 130.81,104.8 133.4,102.21 133.4,80.42 131.72,78.74 7SEG/LEDS3.3
N$78
  Bottom 0.152: D4.2 123.19,103.12 131.57,94.74 131.57,90.17 7SEG/LEDS2.3
N$79
  Top 0.152: D5.2 115.57,117.6 131.57,101.6 7SEG/LEDS.3
N$80  (via drill 0.35)
  Top 0.152: v29.01,65.48 29.01,65.63 18.03,76.61 18.03,95.2 18.95,96.11 18.95,96.88 R18.1 | v39.37,55.12 52.63,55.12 v59.49,48.26 | v132.79,29.52 136.6,29.52 138.12,27.99 142.39,27.99 v144.37,26.01
  Bottom 0.152: v39.37,55.12 v29.01,65.48 | v59.49,48.26 86.16,48.26 89.2,45.21 107.04,45.21 112.06,40.18 122.12,40.18 v132.79,29.52 | v144.37,26.01 144.37,26.47 150.62,32.72 150.62,33.02 IO/7SEG7.3
N$81  (via drill 0.35)
  Top 0.152: R17.1 24.13,119.74 22.76,121.11 22.76,123.24 24.43,124.92 31.14,124.92 33.27,122.78 33.27,122.33 33.88,121.72 78.23,121.72 79.6,123.09 91.03,123.09 92.71,124.77 v98.2,124.77 | v149.1,102.67 149.1,45.97 150.62,44.45 IO/7SEG6.3
  Bottom 0.152: v98.2,124.77 130.81,124.77 132.18,123.39 132.18,119.58 v149.1,102.67
N$82  (via drill 0.35)
  Top 0.152: v36.17,32.26 36.63,32.26 51.56,17.32 68.02,17.32 71.98,13.36 83.87,13.36 87.53,9.7 90.42,9.7 90.73,9.4 90.73,8.33 92.56,6.5 138.43,6.5 v147.88,15.95
  Bottom 0.152: R15.1 24.13,40.34 23.06,39.27 23.06,38.51 29.31,32.26 v36.17,32.26 | v147.88,15.95 152.76,20.83 152.76,53.9 150.77,55.88 IO/7SEG5.3
N$83  (via drill 0.35)
  Top 0.152: v87.22,123.7 91.19,123.7 94.08,126.59 99.11,126.59 100.63,128.12 145.59,128.12 152.45,121.26 152.45,68.99 150.77,67.31 IO/7SEG4.3
  Bottom 0.152: R14.1 24.13,63.8 27.63,67.31 27.63,69.29 32.36,74.02 37.54,74.02 v87.22,123.7
N$84  (via drill 0.35)
  Top 0.152: v56.9,53.9 55.98,53.9 49.58,60.3 18.34,60.3 18.03,60 18.03,59.39 18.95,58.47 18.95,55.12 R21.1 | v144.22,43.54 144.22,30.28 v147.88,26.62
  Bottom 0.152: v56.9,53.9 57.51,53.29 62.38,53.29 62.54,53.44 86,53.44 88.75,50.7 100.33,50.7 102.46,52.83 113.44,52.83 120.6,45.67 120.6,43.84 121.67,42.77 143.46,42.77 v144.22,43.54 | v147.88,26.62 147.88,24.33 150.62,21.59 IO/7SEG8.3
N$85  (via drill 0.35)
  Top 0.152: v143,2.08 142.39,1.47 17.88,1.47 5.84,13.51 5.84,14.43 7.52,16.1 7.52,16.41 GPIO'S.9
  Bottom 0.152: v143,2.08 143,20.07 141.48,21.59 IO/7SEG8.1
N$86  (via drill 0.35)
  Top 0.152: v89.2,6.05 v20.62,6.05 | v135.99,23.42 v135.99,20.22
  Bottom 0.152: v20.62,6.05 GPIO'S.8 | v89.2,6.05 121.82,6.05 v135.99,20.22 | v135.99,23.42 141.33,28.75 141.33,33.02 IO/7SEG7.1
N$87  (via drill 0.35)
  Top 0.152: v138.12,26.47 v138.12,19.76 | v138.12,28.91 138.12,36.22 141.33,39.42 141.33,44.45 IO/7SEG6.1
  Bottom 0.152: v138.12,19.76 138.12,13.21 126.09,1.17 26.87,1.17 12.24,15.8 12.24,16.71 7.67,21.29 7.67,21.59 GPIO'S.7 | v138.12,28.91 v138.12,26.47
N$88  (via drill 0.35)
  Top 0.152: v15.29,14.73 23.37,6.66 v87.38,6.66
  Bottom 0.152: v15.29,14.73 15.29,16.1 7.67,23.72 7.67,24.03 GPIO'S.6 | v87.38,6.66 121.51,6.66 146.2,31.34 146.66,31.34 147.73,32.41 147.73,49.63 141.48,55.88 IO/7SEG5.1
N$89  (via drill 0.35)
  Top 0.152: v11.63,26.47 11.48,26.62 7.67,26.62 GPIO'S.5 | v86.92,31.65 v69.7,31.65 | v106.27,44.3 106.27,47.5 112.06,53.29 113.44,53.29 123.8,63.65 v123.8,64.11
  Bottom 0.152: v11.63,26.47 11.94,26.47 17.12,31.65 v69.7,31.65 | v86.92,31.65 87.83,31.65 89.2,33.02 95,33.02 v106.27,44.3 | v123.8,64.11 138.12,64.11 141.33,67.31 IO/7SEG4.1
N$90  (via drill 0.35)
  Top 0.152: v85.55,19.76 86,19.76 88.44,17.32 106.27,17.32 107.19,16.41 110.85,16.41 112.22,17.78 v137.52,17.78
  Bottom 0.152: v85.55,19.76 82.19,19.76 79.91,22.05 79.91,22.35 62.23,40.03 39.22,40.03 37.08,37.9 28.85,37.9 27.94,38.81 24.13,38.81 R16.2 | v137.52,17.78 137.52,20.07 149.1,31.65 149.1,77.22 150.62,78.74 IO/7SEG3.3
N$91  (via drill 0.35)
  Top 0.152: v77.16,93.22 23.82,93.22 22.3,94.74 19.1,94.74 R19.2 | v96.52,95.96 v79.91,95.96
  Bottom 0.152: v79.91,95.96 v77.16,93.22 | v96.52,95.96 99.26,93.22 103.07,93.22 104.44,91.85 127.61,91.85 130.05,89.41 130.05,77.98 130.96,77.06 132.33,77.06 139.34,84.07 139.34,101.91 140.72,103.28 142.09,103.28 150.62,94.74 150.62,90.17 IO/7SEG2.3
N$92  (via drill 0.35)
  Top 0.152: v72.14,117.91 92.56,117.91 94.84,115.62 95.45,115.62 98.81,118.97 98.81,125.83 100.79,127.81 145.44,127.81 150.62,122.63 150.62,101.6 IO/7SEG.3
  Bottom 0.152: v72.14,117.91 69.55,117.91 33.58,81.94 23.82,81.94 22.76,80.87 19.1,80.87 R20.2
N$93  (via drill 0.35)
  Top 0.152: v16.66,18.69 10.11,25.25 6.76,25.25 5.84,26.16 5.84,27.08 7.52,28.75 7.52,29.21 GPIO'S.4 | v124.1,29.21 130.2,29.21 138.28,37.29 138.28,75.69 141.33,78.74 IO/7SEG3.1
  Bottom 0.152: v16.66,18.69 18.8,18.69 18.95,18.85 82.5,18.85 89.05,12.29 90.42,12.29 91.8,10.92 91.8,10.31 91.95,10.16 96.21,10.16 107.64,21.59 110.85,21.59 112.06,22.81 119.08,22.81 124.26,27.99 124.26,29.06 v124.1,29.21
N$94  (via drill 0.35)
  Top 0.152: v57.81,53.9 60.1,51.61 60.1,46.58 57.81,44.3 57.2,44.3 56.9,44.6 20.62,44.6 18.19,42.16 7.06,42.16 6.15,41.25 6.15,40.64 9.5,37.29 9.5,33.93 7.67,32.11 7.67,31.8 GPIO'S.3
  Bottom 0.152: v57.81,53.9 84.78,53.9 103.83,72.95 139.19,72.95 139.65,73.41 139.65,88.49 141.33,90.17 IO/7SEG2.1
N$95  (via drill 0.35)
  Top 0.152: v19.25,18.24 19.25,19.76 8.74,30.28 6.91,30.28 5.84,31.34 5.84,32.26 7.52,33.93 7.52,34.24 GPIO'S.2
  Bottom 0.152: v19.25,18.24 23.22,14.28 23.22,12.75 31.45,4.52 128.52,4.52 136.6,12.6 136.6,21.29 146.36,31.04 146.81,31.04 148.34,32.56 148.34,94.74 141.48,101.6 IO/7SEG.1
N$96  (via drill 0.35)
  Top 0.152: v75.03,41.55 75.03,62.74 v60.25,77.52
  Bottom 0.152: v75.03,41.55 88.75,27.84 90.58,27.84 93.93,24.49 93.93,15.49 92.86,14.43 92.86,13.82 U1.P$42 | v60.25,77.52 60.25,79.05 59.79,79.5 U$1.SCL